# Altium PCB playC.PcbDoc
Units mm, origin at the board's own origin, x right, y up, seen from the top; angles counter-clockwise.
Board outline 50 x 50 mm, 2 copper layers (Top Layer, Bottom Layer); 53 components, 50 nets, 248 pads, 87 vias.
Unrouted connection lines stored in the file: 45.
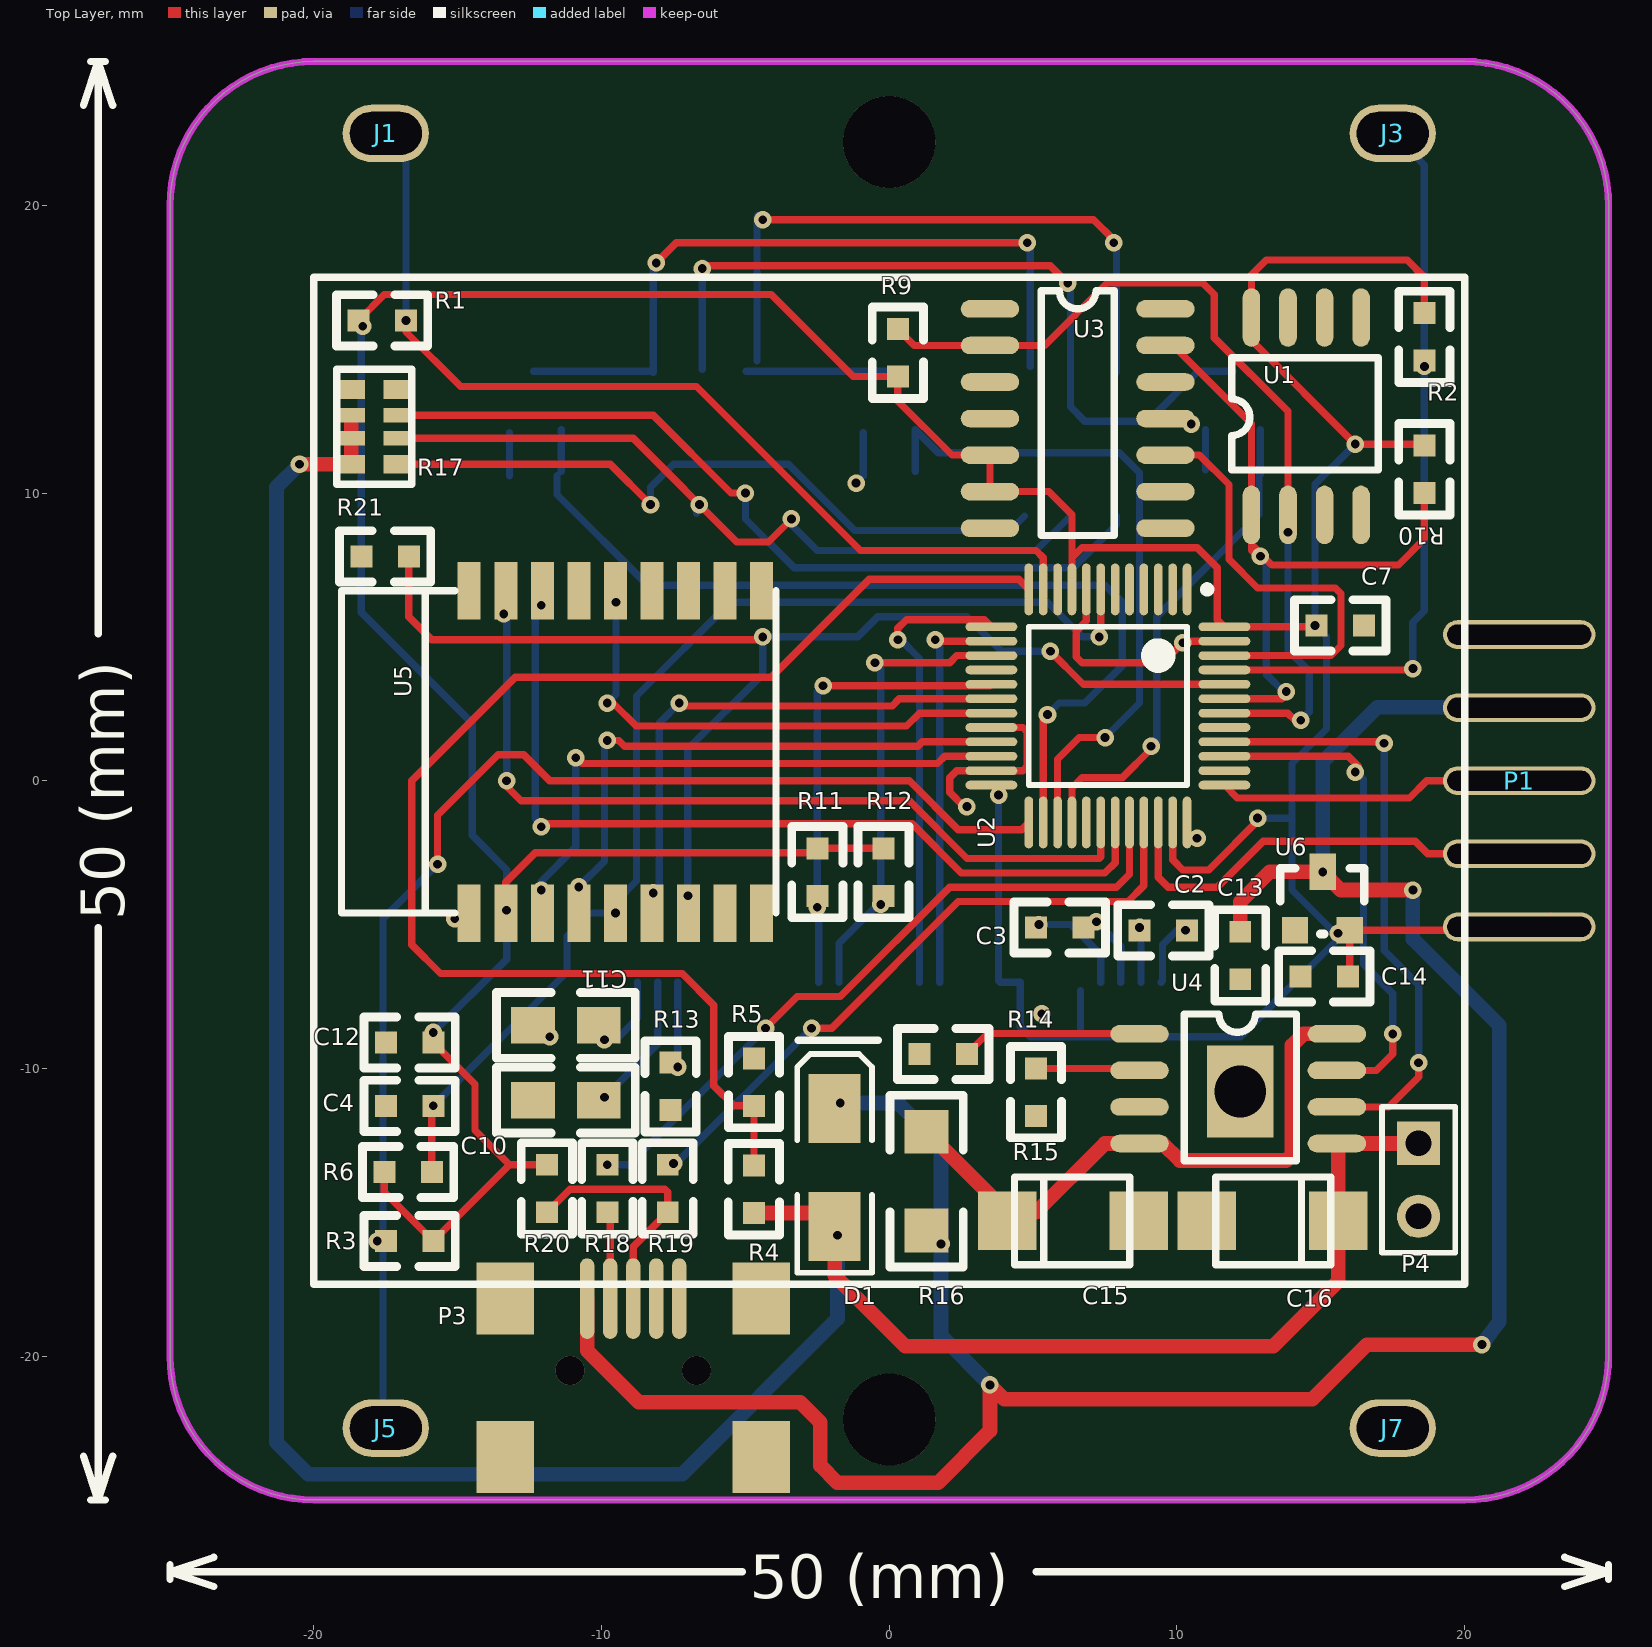
[diagram p0: Top Layer view]
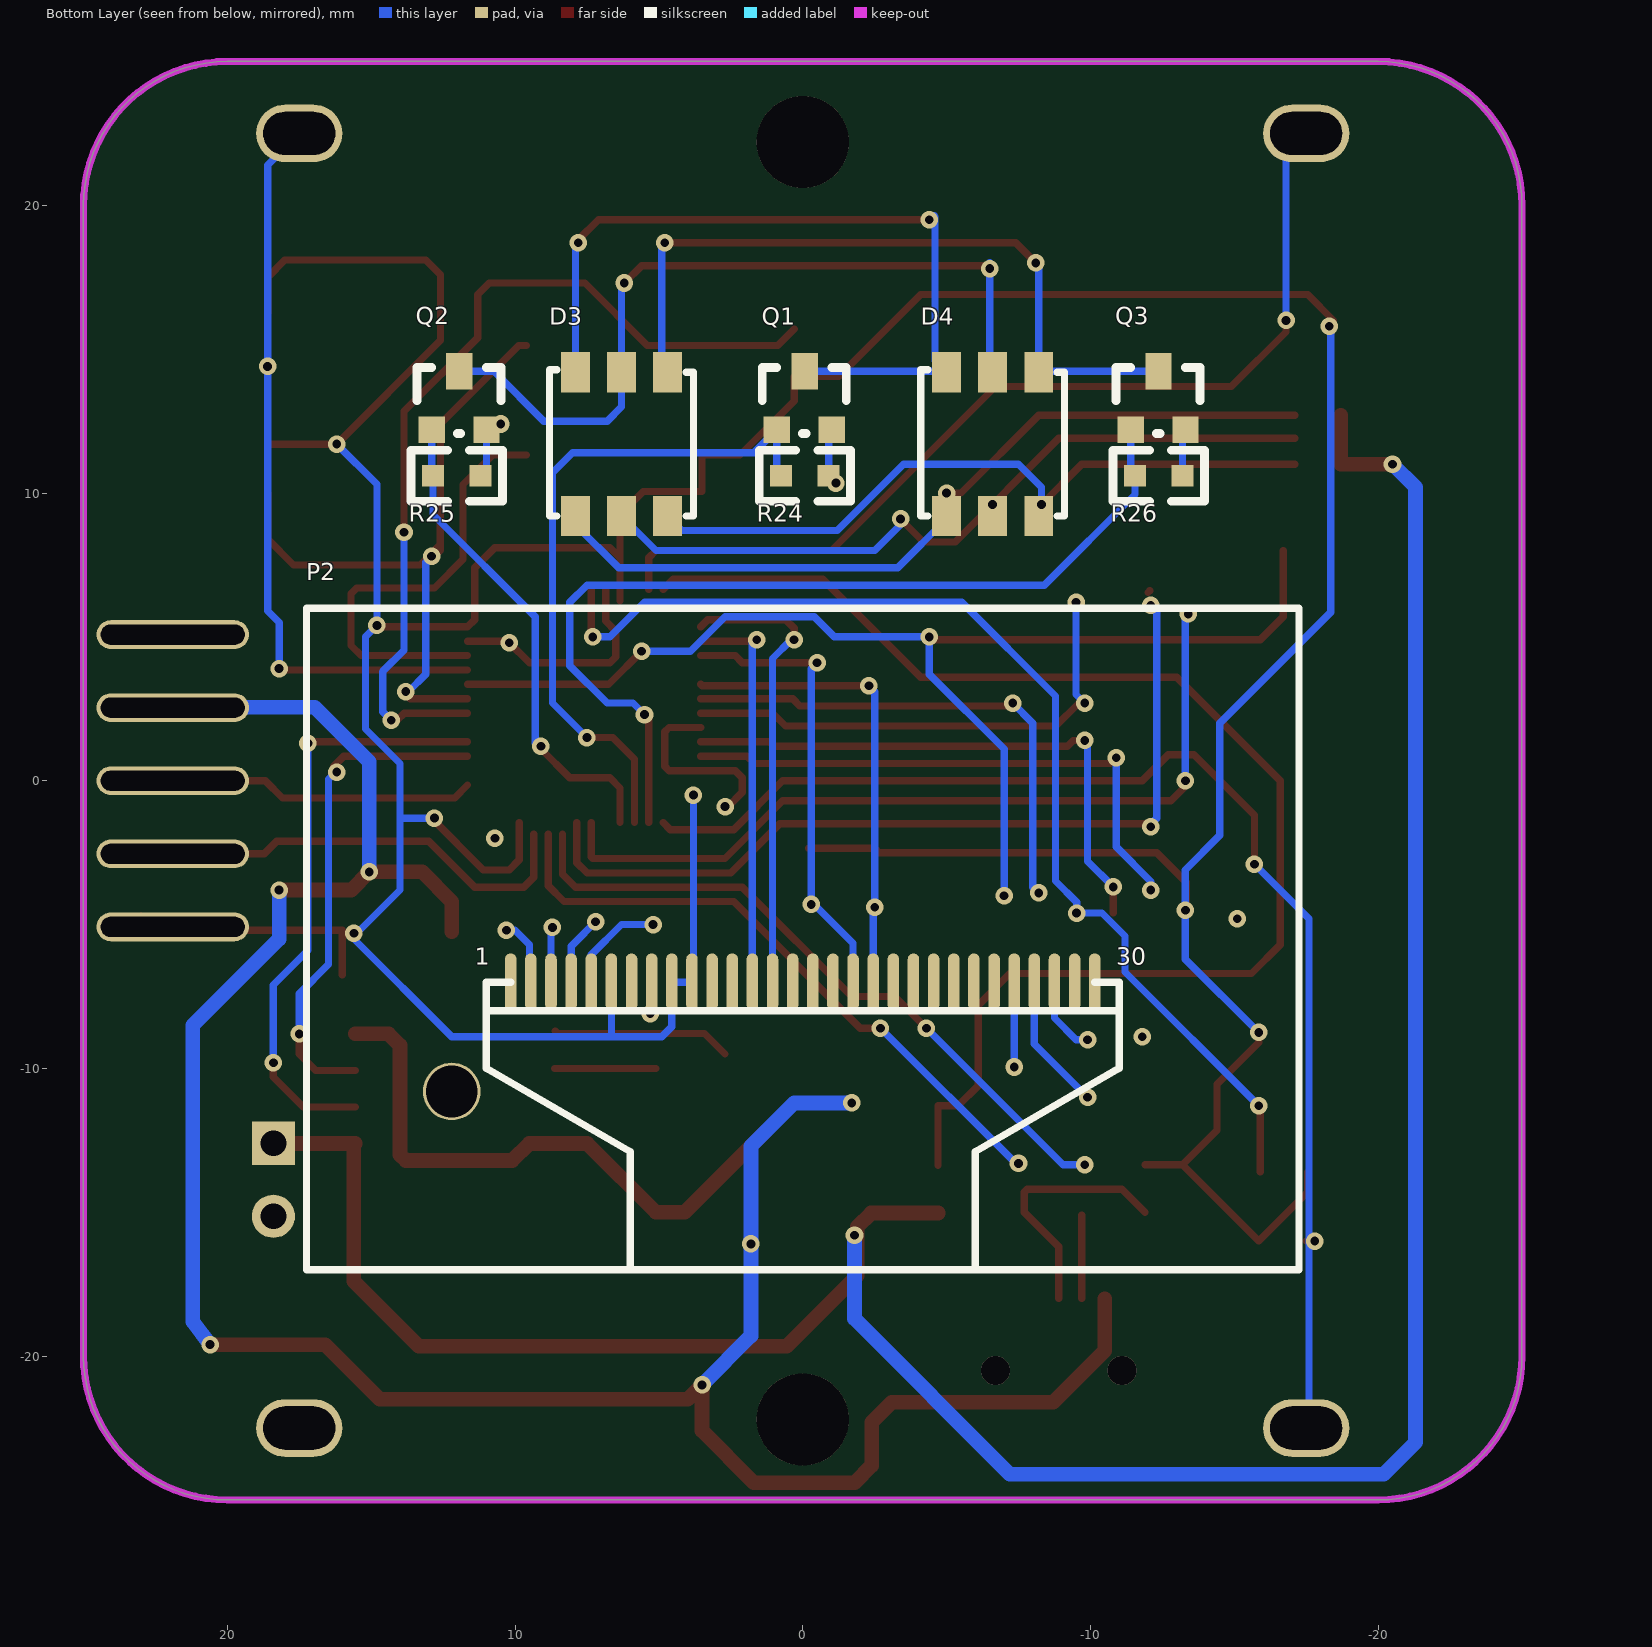
[diagram p1: Bottom Layer view, seen from below]

## Layer stack, top to bottom
Top Layer: signal copper 0.0356
Dielectric: dielectric 0.32, FR-4, Dk 4.8
Bottom Layer: signal copper 0.0356

## Board outline
-25,-20 ccw(c-20,-20) -20,-25 20,-25 ccw(c20,-20) 25,-20 25,20 ccw(c20,20) 20,25 -20,25 ccw(c-20,20) -25,20

## Design rules (kind name [scope] priority, off if disabled: settings)
Clearance [All] p1: gap=0.152
ComponentClearance [All] p1 off: gap=0.254 collisioncheckmode=3 verticalgap=0.254 showdistances=FALSE
HoleSize [All] p1: absolutevalues=TRUE maxlimit=5.08 minlimit=0.025 maxpercent=80.000 minpercent=20.000
MinimumSolderMaskSliver [All] p1 off: minsoldermaskwidth=0.254
PolygonConnect [All] p1: connectstyle=Relief reliefconductorwidth=0.508 reliefentries=4 polygonreliefangle="90 Angle"
RoutingVias [All] p1: holewidth=0.305 width=0.61 viastyle="Through Hole" minholewidth=0.305 minwidth=0.61 maxholewidth=7.112 maxwidth=12.7
SilkToSilkClearance [All] p1 off: silktosilkclearance=0.254
SilkscreenOverComponentPads [All] p1 off: minsilkscreentomaskgap=0.254
SolderMaskExpansion [All] p1: expansion=0.102
TestPointUsage [All] p1: valid=0 allowmultiple=FALSE
Testpoint [All] p1: side=15 testpointundercomponent=TRUE minsize=1.016 maxsize=2.54 preferedsize=1.524 minholesize=0 maxholesize=1.016 preferedholesize=0.813 testpointgrid=0.025 style=1023 order=0-112345678
Width [All] p1: maxlimit=1.27 minlimit=0.254 preferedwidth=0.254
19 further rules are at their usual default settings.

## Components (designator, comment, footprint, x,y, rotation, side; value= is the part's Value field where it differs from the comment)
C2 "105" 0603 8.7,-5.2 r180 top
C3 "105" 0603 5.1,-5.1 r180 top
C4 "104" 0603 -17.5,-11.3 r180 top
C7 "104" 0603 16.5,5.4 r0 top
C10 "4.7uF" 0805 -10.1,-11.1 r180 top
C11 "2.2uF" 0805 -10.1,-8.5 r180 top
C12 "104" 0603 -17.5,-9.1 r180 top
C13 "104" 0603 12.2,-6.9 r270 top
C14 "104" 0603 14.3,-6.8 r180 top
C15 "10uF" Cap_Tan_B 4.1,-15.3 r0 top
C16 "10uF" Cap_Tan_B 15.6,-15.3 r180 top
D1 "SS12" SMA -1.9,-15.5 r90 top
D3 "LED" 5050_LED 6.3,11.7 r90 bottom
D4 "LED" 5050_LED -6.6,11.7 r90 bottom
J1 "PAD" LINK_HOLE#1 -17.5,22.5 r0 top
J3 "PAD" LINK_HOLE#1 17.5,22.5 r0 top
J5 "PAD" LINK_HOLE#1 -17.5,-22.5 r0 top
J7 "PAD" LINK_HOLE#2 17.6,-22.6 r0 top
P1 "Header 5H" connect_5pin 24.1,0 r0 top
P2 "Header 30" OLED(30PIN_1.3') 0,-5.5 r180 bottom locked
P3 "Header 5" Mini_USB_IN -7.3,-18 r180 top locked
P4 "Header 2" HDR1X2 18.4,-12.6 r270 top
Q1 "2N7002" SOT23 0.9,12.2 r270 bottom
Q2 "2N7002" SOT23 12.9,12.2 r270 bottom
Q3 "2N7002" SOT23 -11.4,12.2 r270 bottom
R1 "10K" 0603 -16.8,16 r0 top
R2 "10K" 0603 18.6,14.6 r270 top
R3 "10K" 0603 -17.5,-16 r180 top
R4 "100k" 0603 -4.705,-15.026 r270 top
R5 "100k" 0603 -4.7,-11.3 r270 top
R6 "10K" 0603 -15.9,-13.6 r0 top
R9 "10K" 0603 0.3,15.7 r90 top
R10 "10K" 0603 18.6,10 r270 top
R11 "4.7k" 0603 -2.5,-4 r270 top
R12 "4.7k" 0603 -0.2,-4 r270 top
R13 "560k" 0603 -7.6,-9.8 r90 top
R14 "10k" 0603 2.7,-9.5 r0 top
R15 "2" 0603 5.1,-10 r90 top
R16 "0.4" 1206 1.3,-12.2 r0 top
R17 "220" 0603_4 -17.2,13.6 r90 top
R18 "10" 0603 -9.8,-15 r270 top
R19 "10" 0603 -7.7,-15 r270 top
R20 "1.5k" 0603 -11.9,-15 r270 top
R21 "10K" 0603 -18.351,7.8 r180 top
R24 "100k" 0603 -0.9,10.6 r180 bottom
R25 "100k" 0603 11.2,10.6 r180 bottom
R26 "100k" 0603 -13.2,10.6 r180 bottom
U1 "LM75" SOIC-8 16.4,16.1 r90 top
U2 "STM32F103CBT6" LQFP48_N 7.6,2.6 r270 top locked
U3 "RX-8025" SOP-14 3.5,16.4 r0 top
U4 "TP4056" TP4056 8.7,-8.8 r0 top
U5 "BM-S02_BT4.0" BM_S02_Bluetooth4.0 -14.6,-4.6 r90 top locked
U6 "ME6206" BAT54-S 14.1,-5.2 r270 top

## Footprints (in the part's own frame and the unit in brackets; to place one, negate y for a bottom-side part, rotate by r counter-clockwise, add the part's x,y. Pads: shape width x height; smd on the part's side, far side on the other; paste and mask are expansions set on the pad)
0603 [mil]
  rect 30x30 smd: 1(0,0) 2(-65,0)
  silkscreen extent -95,-35 30,35
0603_4 [mm]
  rect 0.65x0.962 smd: 1(0,-0.1) 8(0,1.5)
  rect 0.5x0.962 smd: 2(-0.9,-0.1) 3(-1.7,-0.1) 6(-1.7,1.5) 7(-0.9,1.5)
  rect 0.64x0.962 smd: 4(-2.6,-0.1) 5(-2.6,1.5)
  silkscreen extent -3.3,-0.6 0.7,2
0805 [mil]
  rect 60x50 smd mask+4: 1(0,0) 2(90,0)
  silkscreen extent -50,-45 140,45
1206 [mil]
  rect 60x60 smd mask+4: 1(0,0) 2(0,-135)
  silkscreen extent -50,-185 50,50
5050_LED [mm]
  rect 1.4x1 smd: 1(-2.5,1.6) 2(-2.5,0) 3(-2.5,-1.6) 4(2.5,-1.6) 5(2.5,0) 6(2.5,1.6)
  silkscreen extent -2.5,-2.5 2.58,2.5
BAT54-S [mil]
  rect 36x36 smd mask+4: 1(0,0) 2(0,75)
  rect 50x36 smd mask+4: 3(-80,38)
  silkscreen extent -85,-20 5,95
BM_S02_Bluetooth4.0 [mm]
  rect 2x0.8 smd: 1(0,0) 2(0,-1.27) 3(0,-2.54) 4(0,-3.81) 5(0,-5.08) 6(0,-6.35) 7(0,-7.62) 8(0,-8.89) 9(0,-10.16) 10(11.2,-10.16) 11(11.2,-8.89) 12(11.2,-7.62) 13(11.2,-6.35) 14(11.2,-5.08) 15(11.2,-3.81) 16(11.2,-2.54) 17(11.2,-1.27) 18(11.2,0)
  silkscreen extent 0,-10.66 11.2,4.44
Cap_Tan_B [mil]
  rect 80x80 smd: 1(0,0) 2(180,0)
  silkscreen extent 10,-60 167,60
connect_5pin [mm]
  oval 5.3x1 hole 0.7 slot 5 at 0 deg: 1(-2.2,5.08) 2(-2.2,2.54) 3(-2.2,0) 4(-2.2,-2.54) 5(-2.2,-5.08)
HDR1X2 [mm] "Connector; Header; 2 Position"
  rect 1.5x1.5 hole 0.9: 1(0,0)
  round 1.5 hole 0.9: 2(2.54,0)
  silkscreen extent -1.27,-1.27 3.81,1.27
LINK_HOLE#1 [mm]
  oval 3x2 hole 1.5 slot 2.5 at 0 deg: 1(0,0)
LINK_HOLE#2 [mm]
  oval 3x2 hole 1.5 slot 2.5 at 0 deg: 1(-0.1,0.1)
LQFP48_N [mm]
  oval 1.8x0.3 smd: 1(-4.05,2.75) 2(-4.05,2.25) 3(-4.05,1.75) 4(-4.05,1.25) 5(-4.05,0.75) 6(-4.05,0.25) 7(-4.05,-0.25) 8(-4.05,-0.75) 9(-4.05,-1.25) 10(-4.05,-1.75) 11(-4.05,-2.25) 12(-4.05,-2.75) 25(4.05,-2.75) 26(4.05,-2.25) 27(4.05,-1.75) 28(4.05,-1.25) 29(4.05,-0.75) 30(4.05,-0.25) 31(4.05,0.25) 32(4.05,0.75) 33(4.05,1.25) 34(4.05,1.75) 35(4.05,2.25) 36(4.05,2.75)
  oval 0.3x1.8 smd: 13(-2.75,-4.05) 14(-2.25,-4.05) 15(-1.75,-4.05) 16(-1.25,-4.05) 17(-0.75,-4.05) 18(-0.25,-4.05) 19(0.25,-4.05) 20(0.75,-4.05) 21(1.25,-4.05) 22(1.75,-4.05) 23(2.25,-4.05) 24(2.75,-4.05) 37(2.75,4.05) 38(2.25,4.05) 39(1.75,4.05) 40(1.25,4.05) 41(0.75,4.05) 42(0.25,4.05) 43(-0.25,4.05) 44(-0.75,4.05) 45(-1.25,4.05) 46(-1.75,4.05) 47(-2.25,4.05) 48(-2.75,4.05)
  silkscreen extent -4.17,-2.75 2.75,3.58
Mini_USB_IN [mm]
  rect 2x2.5 smd: 0(-2.85,5.5) 0(-2.85,0) 0(6.05,5.5) 0(6.05,0)
  oval 0.5x2.8 smd: 1(3.2,0) 2(2.4,0) 3(1.6,0) 4(0.8,0) 5(0,0)
OLED(30PIN_1.3') [mm]
  oval 0.4x2 smd: 1(-10.15,-1.5) 2(-9.45,-1.5) 3(-8.75,-1.5) 4(-8.05,-1.5) 5(-7.35,-1.5) 6(-6.65,-1.5) 7(-5.95,-1.5) 8(-5.25,-1.5) 9(-4.55,-1.5) 10(-3.85,-1.5) 11(-3.15,-1.5) 12(-2.45,-1.5) 13(-1.75,-1.5) 14(-1.05,-1.5) 15(-0.35,-1.5) 16(0.35,-1.5) 17(1.05,-1.5) 18(1.75,-1.5) 19(2.45,-1.5) 20(3.15,-1.5) 21(3.85,-1.5) 22(4.55,-1.5) 23(5.25,-1.5) 24(5.95,-1.5) 25(6.65,-1.5) 26(7.35,-1.5) 27(8.05,-1.5) 28(8.75,-1.5) 29(9.45,-1.5) 30(10.15,-1.5)
  silkscreen extent -17.25,-11.5 17.25,11.5
SMA [mm] "DO-214-AC/SMA; 2 C-Bend Leads; Body 5 x 2.7 mm, inc. leads (LxW)"
  rect 2.4x1.8 smd: 1(0,0) 2(4.1,0)
  silkscreen extent -1.6,-1.52 6.48,1.3
SOIC-8 [mil]
  oval 80x24 smd mask+4: 1(-270,150) 2(-270,100) 3(-270,50) 4(-270,0) 5(0,0) 6(0,50) 7(0,100) 8(0,150)
  silkscreen extent -209,-24 -55,177
SOP-14 [mil]
  oval 80x24 smd mask+4: 1(0,0) 2(0,-50) 3(0,-100) 4(0,-150) 5(0,-200) 6(0,-250) 7(0,-300) 8(240.16,-300) 9(240.16,-250) 10(240.16,-200) 11(240.16,-150) 12(240.16,-100) 13(240.16,-50) 14(240.16,0)
  silkscreen extent 70,-310 170,25
SOT23 [mil]
  rect 36x36 smd mask+4: 1(0,0) 3(0,75)
  rect 50x36 smd mask+4: 2(-80,38)
  silkscreen extent -85,-20 5,95
TP4056 [mil]
  rect 90.55x125.98 smd: 0(137.8,-78.74)
  round 78.74 hole 70.87: 0(137.8,-78.74)
  oval 80x24 smd mask+4: 1(0,0) 2(0,-50) 3(0,-100) 4(0,-150) 5(270,-150) 6(270,-100) 7(270,-50) 8(270,0)
  silkscreen extent 61,-174 215,27

## Part data
C2 C3 C4 C7 C10 C11 C12 C13 C14: library part Cap, "Capacitor"
C15 C16: library part "Cap Pol1", "Polarized Capacitor (Radial)"
D1: library part "D Schottky", "Schottky Diode"
D3 D4: library part LED_6Pin
J1 J3 J5 J7: library part Socket, "Socket"
P1: "Header, 5-Pin, Right Angle"
P2: "Header, 30-Pin"
P3: "Header, 5-Pin"
P4: "Header, 2-Pin"
Q1 Q2 Q3: library part MOSFET-N, "N-Channel MOSFET"
R1 R2 R3 R4 R5 R6 R9 R10 R11 R12 R13 R14 R15 R16 R18 R19 R20 R21 R24 R25 R26: library part Res2, "Resistor"
R17: library part RES_SELF_4
U3: library part RX-8025T

## Free pads (board coordinates)
  round 3.2 hole 3.2: 0(0,-22.2) 0(0,22.2)

## Via types
v1: diameter 0.61, hole 0.305, Top Layer to Bottom Layer, 85 vias
v2: diameter 1, hole 1, Top Layer to Bottom Layer, 2 vias

## Nets (pads, with @x,y where several pads share a name; then routed paths per layer and width w, separated by ;. In a path a pad name is that pad's centre, name@x,y a point inside that pad or via, vN(x,y) a via of type N, cw(c..) or ccw(c..) an arc to the next point about the centre after c; other vN are vias at no path point)
BAT_CHRG: U2.39 U4.7 | length 17.6
  Top Layer w0.254: U2.39 15.95,0.85 16.3,0.5 16.3,0.4 v1(16.2,0.3) ; U4.7 16.93,-10.07 17.5,-9.5 v1(17.5,-8.8)
  Bottom Layer w0.254: v1(16.2,0.3) 16.232,0.3 16.484,0.047 16.484,-6.384 17.5,-7.4 v1(17.5,-8.8)
BAT_STDBY: U2.40 U4.6 | length 20.9
  Top Layer w0.254: U2.40 17.15,1.35 v1(17.2,1.3) ; U4.6 17.36,-11.34 18.4,-10.3 v1(18.4,-9.8)
  Bottom Layer w0.254: v1(17.2,1.3) 17.2,-5.9 18.4,-7.1 v1(18.4,-9.8)
BOOT0: R21.2 U2.44 U5.7 | length 42.2
  Top Layer w0.254: R21.2@-16.7,8 -16.7,5.7 -15.9,4.9 -4.5,4.9 v1@-4.44,4.96 ; v1(5.6,4.5) 6.7,3.4 ; 6.75,3.35 U2.44
  Bottom Layer w0.254: v1(-7,-4) -7,1.1 -4.4,3.7 v1(-4.4,5) -1.1,5 -0.4,5.7 2.7,5.7 3.9,4.5 v1(5.6,4.5)
BT_BRTS: U2.19 U5.14 | length 17.5
  Top Layer w0.254: v1(-9.8,2.7) -9.6,2.7 -8.8,1.9 0.6,1.9 1.05,2.35 U2.19
  Bottom Layer w0.254: v1(-9.8,2.7) -9.5,3 v1(-9.5,6.2)
BT_CON: U2.21 U5.4 | length 19.9
  Top Layer w0.254: U5.4 v1(-10.79,-3.69) ; v1(-9.8,1.4) -9.4,1.4 -9.2,1.2 1,1.2 1.15,1.35 U2.21
  Bottom Layer w0.254: v1(-10.79,-3.69) -9.9,-2.8 -9.9,1.3 v1(-9.8,1.4)
BT_EN: U2.18 U5.6 | length 18
  Top Layer w0.254: v1(-7.3,2.7) -7.2,2.6 0.1,2.6 0.35,2.85 U2.18
  Bottom Layer w0.254: v1(-8.2,-3.9) -8,-3.7 -8,2 v1(-7.3,2.7)
BT_RX: U2.30 U5.17 | length 28.7
  Top Layer w0.254: v1@-13.3,-0.2 -12.8,-0.7 0.7,-0.7 2.7,-2.7 7.3,-2.7 7.35,-2.65 U2.30
  Bottom Layer w0.254: v1(-13.4,5.8) -13.3,5.7 v1(-13.3,0)
BT_SLEEP: U2.22 U5.3 | length 19.7
  Top Layer w0.254: v1(-10.9,0.8) -10.7,0.6 1.675,0.6 1.925,0.85 U2.22
  Bottom Layer w0.254: v1(-12.1,-3.8) -12.1,-3.5 -10.9,-2.3 v1(-10.9,0.8)
BT_TX: U2.31 U5.16 | length 30.2
  Top Layer w0.254: v1@-12.1,-1.5 0.8,-1.5 2.506,-3.206 7.494,-3.206 7.85,-2.85 U2.31 ; U5.16 U5.16@-12,6.54
  Bottom Layer w0.254: v1(-12.1,-1.6) -12.1,-1.5 -12.3,-1.3 -12.3,5.9 v1(-12.1,6.1)
BUTTON_DOWN: J5.1 R3.1 U2.25 | length 44.9
  Top Layer w0.254: v1(-17.8,-16) R3.1 ; v1(-15.7,-2.9) -15.7,-1.2 -13.6,0.9 -12.7,0.9 -11.8,0 0.7,0 2.4,-1.7 4.6,-1.7 U2.25
  Bottom Layer w0.254: J5.1@-17.6,-22.4 -17.6,-4.8 v1(-15.7,-2.9)
BUTTON_LEFT: J1.1 R1.1 U2.11 | length 33.7
  Top Layer w0.254: v1(-16.8,16) -16.8,15.6 -14.9,13.7 -6.7,13.7 -1,8 5.1,8 5.35,7.75 U2.11
  Bottom Layer w0.254: J1.1 -16.8,21.8 v1(-16.8,16)
BUTTON_RIGHT: J3.1 R2.1 U2.45 | length 26
  Top Layer w0.254: U2.45 18.15,3.85 v1(18.2,3.9) ; v1(18.6,14.4) R2.1
  Bottom Layer w0.254: J3.1 18.6,21.4 v1(18.6,14.4) 18.6,5.9 18.2,5.5 v1(18.2,3.9)
GND: C4.1 C7.1 C10.2 C11.2 C12.1 C13.1 C14.1 C15.2 C16.2 J7.1 P1.1 P2.1 P2.8 P2.11 P2.12 P2.15 P2.16 P2.17 P2.21 P2.22 P2.23 P2.24 P2.25 P2.29 P2.30 P3.5 P4.2 Q1.3 Q2.3 Q3.3 R5.2 R13.2 R14.2 R15.2 R21.1 R24.1 R25.1 R26.1 U1.4 U1.5 U1.6 U1.7 U2.8 U2.20 U2.23 U2.36 U2.47 U3.7 U3.11 U4.3 U5.1 U6.1 | length 19.2
  Top Layer w0.254: v1(2.7,-0.9) 2.6,-0.9 2.1,-0.4 2.1,0.1 2.35,0.35 U2.23 4.65,0.35 4.8,0.5 4.8,1.7 4.65,1.85 U2.20 ; U2.8 6.85,5.55 6.5,5.2 6.5,4.3 6.7,4.1 9.5,4.1 v1(10.2,4.8) v1@10.25,4.85 ; v1@10.2,4.85 v1@10.25,4.85 ; U2.47 v1@10.25,4.85
  Bottom Layer w0.254: R26.1 Q3.3@-13.2,12.095 ; R24.1 Q1.3@-0.9,12.095 ; R25.1@10.995,10.805 Q2.3
  other v1: -11.8,-8.9 5.3,-8.1 -15.1,-4.8 10.7,-2 -1.154,10.346 10.5,12.4
I2C_SCK: R9.1 U1.2 U2.42 U3.2 | length 31.3
  Top Layer w0.254: R9.1 0.87,15.13 U3.2 5.4,15.13 7.57,17.3 10.9,17.3 11.3,16.9 11.3,15.4 13.86,12.84 U1.2 v1(13.86,8.64) ; U2.42 13.85,2.35 14.1,2.1 v1(14.3,2.1)
  Bottom Layer w0.254: v1(13.86,8.64) 13.86,4.54 14.6,3.8 14.6,2.4 v1(14.3,2.1)
I2C_SDA: R10.1 U1.1 U2.43 U3.13 | length 24.6
  Top Layer w0.254: U3.13 9.867,15.13 12.59,12.407 U1.1 12.6,9.232 12.6,8.2 ; U2.43 13.65,2.85 13.8,3 v1(13.8,3.1) ; v1(12.9,7.8) 12.8,7.8 12.6,8 12.6,8.2 ; R10.1 18.6,8.4 17.7,7.5 13.3,7.5 12.6,8.2
  Bottom Layer w0.254: v1(12.9,7.8) 13.1,7.6 13.1,3.7 13.7,3.1 v1(13.8,3.1)
NetC2_1: C2.1 P2.3 | length 1.9
  Bottom Layer w0.254: v1(8.7,-5.1) 8.75,-5.15 P2.3
NetC2_2: C2.2 P2.2 | length 2.3
  Bottom Layer w0.254: P2.2 9.5,-6.95 9.5,-5.7 10,-5.2 v1(10.3,-5.2)
NetC3_1: C3.1 P2.5 | length 3.5
  Bottom Layer w0.254: v1(5.2,-5) 6.3,-5 7.35,-6.05 P2.5
NetC3_2: C3.2 P2.4 | length 2.7
  Bottom Layer w0.254: v1(7.2,-4.9) 7.1,-4.8 8.05,-5.75 P2.4
NetC10_1: C10.1 P2.27 | length 4.8
  Bottom Layer w0.254: v1(-9.9,-11) -8.05,-9.15 P2.27
NetC11_1: C11.1 P2.28 | length 2.7
  Bottom Layer w0.254: v1(-9.9,-9) -9.5,-9 -8.75,-8.25 P2.28
NetD3_1: D3.1 D4.1 R17.2 | length 28.6
  Top Layer w0.254: R17.2 -8.2,12.7 -5.5,10 v1(-5,10)
  Bottom Layer w0.254: v1(-5,10) -5,9.1 -3.3,7.4 6.4,7.4 7.9,8.9 D3.1
NetD3_2: D3.2 D4.2 R17.3 | length 26.6
  Top Layer w0.254: R17.3 -8.9,11.9 -5.3,8.3 -4.2,8.3 v1(-3.4,9.1)
  Bottom Layer w0.254: D4.2@-6.7,9.3 -6.7,9.5 v1(-6.6,9.6) ; v1(-3.4,9.1) -3.4,8.9 -2.5,8 5.1,8 D3.2
NetD3_3: D3.3 D4.3 R17.4 | length 24.5
  Top Layer w0.254: R17.4 -9.7,11 v1(-8.3,9.6)
  Bottom Layer w0.254: v1(-8.3,9.6) -8.3,10.2 -7.5,11 -3.5,11 -1.2,8.7 4.2,8.7 D3.3
NetD3_4: D3.4 D4.4 Q3.2 | length 25.5
  Top Layer w0.254: v1(-8.1,18) -7.4,18.7 v1(4.8,18.7)
  Bottom Layer w0.254: Q3.2 D4.4@-8.232,14.232 ; D4.4 -8.2,17.9 v1(-8.1,18) ; v1(4.8,18.7) 4.9,18.6 D3.4@4.9,14.4
NetD3_5: D3.5 D4.5 Q2.2 | length 27.8
  Top Layer w0.254: v1(-6.5,17.8) -6.4,17.9 5.6,17.9 v1(6.2,17.3)
  Bottom Layer w0.254: v1@-6.6,17.9 -6.5,18 D4.5@-6.5,14.3 ; v1(6.2,17.3) 6.3,17.3 D3.5 6.3,13 6.8,12.5 9,12.5 10.732,14.232 Q2.2
NetD3_6: D3.6 D4.6 Q1.2 | length 27.4
  Top Layer w0.254: v1(-4.4,19.5) 7.1,19.5 7.8,18.8 v1(7.8,18.7)
  Bottom Layer w0.254: D4.6@-4.968,14.232 Q1.2 ; D4.6@-4.6,14.6 -4.6,19.6 -4.566,19.634 -4.534,19.634 v1(-4.4,19.5) ; v1(7.8,18.7) 7.9,18.7 D3.6
NetP2_26: P2.26 R13.1 | length 2.9
  Bottom Layer w0.254: v1(-7.35,-9.95) P2.26
NetP3_2: P3.2 R18.1 | length 2.9
  Top Layer w0.254: P3.2 R18.1@-9.7,-15.1
NetP3_3: P3.3 R19.1 R20.1 | length 8.8
  Top Layer w0.254: R20.1 -11.1,-14.2 -7.8,-14.2 -7.7,-14.3 R19.1 -8.9,-16.2 P3.3
NetR4_2: R4.2 R5.1 U2.12 | length 48.1
  Top Layer w0.254: R4.2@-4.7,-13.37 R5.1 -5.4,-11.3 -6.1,-10.6 -6.1,-7.8 -7.2,-6.7 -15.6,-6.7 -16.6,-5.7 -16.6,0 -13,3.6 -4.1,3.6 -0.7,7 4.5,7 U2.12
NetR14_1: R14.1 U4.1 | length 6.2
  Top Layer w0.254: R14.1 3.416,-8.784 8.516,-8.784 U4.1@8.6,-8.7
NetR15_1: R15.1 U4.2 | length 3.5
  Top Layer w0.254: R15.1 U4.2@8.63,-10
OLED_CS: P2.13 U2.14 | length 13.7
  Top Layer w0.254: v1@1.833,4.85 U2.14
  Bottom Layer w0.254: v1(1.6,4.9) 1.65,4.9 1.75,4.8 P2.13
OLED_RST: P2.14 U2.13 | length 16.1
  Top Layer w0.254: v1(0.3,4.9) 0.3,5.3 0.6,5.6 3.3,5.6 U2.13
  Bottom Layer w0.254: v1(0.3,4.9) 0.4,4.9 1.05,4.25 P2.14
OLED_SCK: P2.18 R12.1 U2.15 | length 16
  Top Layer w0.254: v1(-0.5,4.1) 2.1,4.1 2.35,4.35 U2.15
  Bottom Layer w0.254: P2.18 -1.75,-5.65 -0.4,-4.3 v1(-0.3,-4.3) -0.3,3.9 v1(-0.5,4.1)
OLED_SDA: P2.19 R11.1 U2.17 | length 16.3
  Top Layer w0.254: v1(-2.3,3.3) 3.5,3.3 U2.17
  Bottom Layer w0.254: P2.19 -2.45,-4.45 v1(-2.5,-4.4) -2.5,3.1 v1(-2.3,3.3)
PWM_B: Q3.1 R26.2 U2.26 | length 32.6
  Top Layer w0.254: U2.26 5.35,2.15 v1(5.5,2.3)
  Bottom Layer w0.254: R26.2 -11.549,9.949 -8.4,6.8 7.5,6.8 8.1,6.2 8.1,4 6.8,2.7 5.9,2.7 v1(5.5,2.3) ; R26.2@-11.4,10.749 Q3.1
PWM_G: Q2.1 R25.2 U2.28 | length 17.2
  Top Layer w0.254: U2.28 6.35,-0.25 6.7,0.1 8.1,0.1 9.1,1.1 v1(9.1,1.2)
  Bottom Layer w0.254: v1(9.1,1.2) 9.2,1.2 9.3,1.3 9.3,5.7 12.851,9.251 R25.2 ; R25.2@12.9,10.649 Q2.1
PWM_R: Q1.1 R24.2 U2.27 | length 23.7
  Top Layer w0.254: U2.27 5.85,0.75 6.6,1.5 v1(7.5,1.5)
  Bottom Layer w0.254: R24.2@0.9,10.749 Q1.1 1.7,11.4 8,11.4 8.7,10.7 8.7,2.7 v1(7.5,1.5)
RESET: C4.2 R6.1 U2.7 U5.5 | length 39.6
  Top Layer w0.254: R6.1 -15.9,-11.351 v1(-15.849,-11.3) ; v1(7.3,5) 7.35,5.05 U2.7
  Bottom Layer w0.254: v1(-15.849,-11.3) -11.2,-6.651 -11.2,-5.4 -10.4,-4.6 v1(-9.52,-4.6) -9.52,-4.22 -8.784,-3.484 -8.784,2.942 -5.526,6.2 5.5,6.2 6.7,5 v1(7.3,5)
RTC_INT: U2.46 U3.10 | length 15.6
  Top Layer w0.254: U3.10 10.78,11.32 11.806,10.294 11.806,7.694 12.8,6.7 15.5,6.7 15.7,6.5 15.7,4.7 15.35,4.35 U2.46
SW_CLK: P1.3 U2.37 | length 10.7
  Top Layer w0.254: U2.37 12.1,-0.6 18.08,-0.6 18.68,0 P1.3
SW_DIO: P1.4 U2.34 | length 15
  Top Layer w0.254: U2.34@9.35,-1.85 9.35,-3.35 9.7,-3.7 11.4,-3.7 13,-2.1 18.28,-2.1 18.72,-2.54 P1.4
USB_5V: C13.2 D1.2 P1.2 P3.1 R16.2 U6.3 | length 88.6
  Top Layer w0.508: P3.1 -10.5,-19.818 -8.709,-21.609 -3.091,-21.609 -2.4,-22.3 -2.4,-23.8 -1.8,-24.4 1.7,-24.4 3.5,-22.6 v1(3.5,-21) 4,-21.5 14.7,-21.5 16.6,-19.6 v1(20.6,-19.6) ; C13.2 12.2,-4.2 13.232,-3.168 v1(15.065,-3.168) 15.697,-3.8 v1(18.2,-3.8)
  Bottom Layer w0.508: v1(-1.7,-11.2) 0.3,-11.2 1.8,-12.7 v1(1.8,-16.1) 1.8,-19.3 v1(3.5,-21) ; v1(15.065,-3.168) 15.065,0.665 16.96,2.56 P1.2@21.88,2.56 ; v1(18.2,-3.8) 18.2,-5.5 21.2,-8.5 21.2,-18.8 v1(20.6,-19.6)
USB_5V_R: C15.1 R16.1 U4.4 U4.8 | length 20.7
  Top Layer w0.508: R16.1 4.1,-15 5.1,-15 7.49,-12.61 9.51,-12.61 10.1,-13.2 13.8,-13.2 14,-13 14,-9.2 14.4,-8.8 U4.8
USBDM: R18.2 U2.32 | length 23.7
  Top Layer w0.254: v1(-4.3,-8.6) -3.2,-7.5 -1.7,-7.5 2.1,-3.7 7.9,-3.7 8.35,-3.25 U2.32@8.35,-1.85
  Bottom Layer w0.254: v1(-9.8,-13.349) -9.049,-13.349 v1(-4.3,-8.6)
USBDP: R19.2 U2.33 | length 22.1
  Top Layer w0.254: v1(-2.7,-8.6) -2,-8.6 2.4,-4.2 8.3,-4.2 8.85,-3.65 U2.33@8.85,-1.85
  Bottom Layer w0.254: v1(-7.5,-13.3) -7.4,-13.3 v1(-2.7,-8.6)
VBAT: C16.1 D1.1 P4.1 R4.1 R17.5 R17.6 R17.7 U4.5 | length 94.7
  Top Layer w0.508: v1(-20.5,11) R17.5 R17.7 ; R4.1 -2.374,-15.026 D1.1 -1.9,-17.2 0.556,-19.656 13.344,-19.656 15.6,-17.4 C16.1 U4.5@15.6,-12.652 ; U4.5 P4.1@18.39,-12.61
  Bottom Layer w0.508: v1(-20.5,11) -21.3,10.2 -21.3,-23 -20.2,-24.1 -7.2,-24.1 -1.8,-18.7 v1(-1.8,-15.8)
VCC_3V: C7.2 C12.2 C14.2 P1.5 P2.6 P2.9 P2.10 R1.2 R2.2 R3.2 R6.2 R9.2 R10.2 R11.2 R12.2 R20.2 U1.8 U2.9 U2.24 U2.35 U2.48 U3.5 U3.6 U5.2 U6.2 | length 174.2
  Top Layer w0.254: R1.2 -17.551,16.9 -4.1,16.9 -1.249,14.049 R9.2 0.3,13.2 2.18,11.32 U3.5 U3.6 5.55,10.05 6.35,9.25 6.35,7.75 ; R6.2 -17.551,-14.298 R3.2 -13.198,-13.349 ; v1(-15.849,-8.749) C12.2 -14.4,-10.549 -14.4,-12.147 -13.198,-13.349 ; U5.2 -13.33,-3.53 -12.3,-2.5 -2.651,-2.5 R11.2 R12.2 ; R20.2 -13.198,-13.349 ; U2.9@6.35,6.25 U2.9 6.35,7.75 ; U2.35 9.85,-2.75 10.2,-3.1 11.1,-3.1 v1@12.9,-1.3 ; C7.2@14.599,5.35 U2.48 11.4,5.6 11.4,7.4 10.7,8.1 6.7,8.1 6.35,7.75 ; C14.2@16.005,-6.746 U6.2 18.56,-5.2 P1.5@19.96,-5.2 ; R10.2 18.551,11.7 v1(16.2,11.7) 12.59,15.31 U1.8 12.59,17.59 13.1,18.1 18,18.1 18.6,17.5 R2.2 ; P1.5@20.1,-5.06 22.64,-5.06 P1.5@23,-4.7
  Bottom Layer w0.254: -18.351,8 -18.351,8.2 ; v1(-18.3,15.8) -18.351,15.749 -18.351,8.2 ; v1(-15.849,-8.749) -13.3,-6.2 v1(-13.3,-4.5) -13.3,-3.1 -14.5,-1.9 -14.5,2 -18.351,5.851 -18.351,8.2 ; v1(3.8,-0.5) 3.8,-6.95 P2.10 P2.9 4.55,-8.55 4.9,-8.9 12.2,-8.9 15.65,-5.45 14,-3.8 14,-1.3 ; 6.65,-8.85 P2.6@6.65,-7.3 ; v1(12.8,-1.3) 14,-1.3 ; v1(16.2,11.7) 14.8,10.3 v1(14.8,5.4) 15.2,5 15.2,1.8 14,0.6 14,-1.3
  other v1: 15.6,-5.3
pads on no net: P2.7 P2.20 P3.0 P3.4 R17.1 R17.8 U1.3 U2.1 U2.2 U2.3 U2.4 U2.5 U2.6 U2.10 U2.16 U2.29 U2.38 U2.41 U3.1 U3.3 U3.4 U3.8 U3.9 U3.12 U3.14 U4.0 U5.8 U5.9 U5.10 U5.11 U5.12 U5.13 U5.15 U5.18
copper on no net:
  other v2: -11.1,-20.5 -6.7,-20.5

## Keep-outs
Keep-Out Layer:
  the board outline again, w0.254

## Silkscreen, mask and mechanical layers (free items; w line width, h text height)
Top Overlay:
  lines w0.254: -28.008,-23.476 -27.5,-25 ; -28.008,23.476 -27.5,25 ; -27.754,-25 -27.246,-25 ; -27.754,25 -27.246,25 ; -27.5,-5.104 -27.5,-25 ; -27.5,5.104 -27.5,25 ; -26.992,-23.476 -27.5,-25 ; -26.992,23.476 -27.5,25 ; -25,-27.754 -25,-27.246 ; -23.476,-28.008 -25,-27.5 ; -23.476,-26.992 -25,-27.5 ; -5.104,-27.5 -25,-27.5 ; 5.104,-27.5 25,-27.5 ; 23.476,-28.008 25,-27.5 ; 23.476,-26.992 25,-27.5 ; 25,-27.754 25,-27.246 ; -20,-17.5 20,-17.5 20,17.5 -20,17.5 -20,-17.5
  text "50 (mm)" at -26.586,-4.85 h1.52 r90
  text "50 (mm)" at -4.85,-28.414 h1.52

## Text inside footprints (layer, text, board x,y; h text height)
P2: Bottom Overlay "30" at -10.9,-6.6 h1.02; Bottom Overlay "1" at 11.4,-6.6 h1.02